# EAGLE board UnoMotorShield (EAGLE 7.2.0)
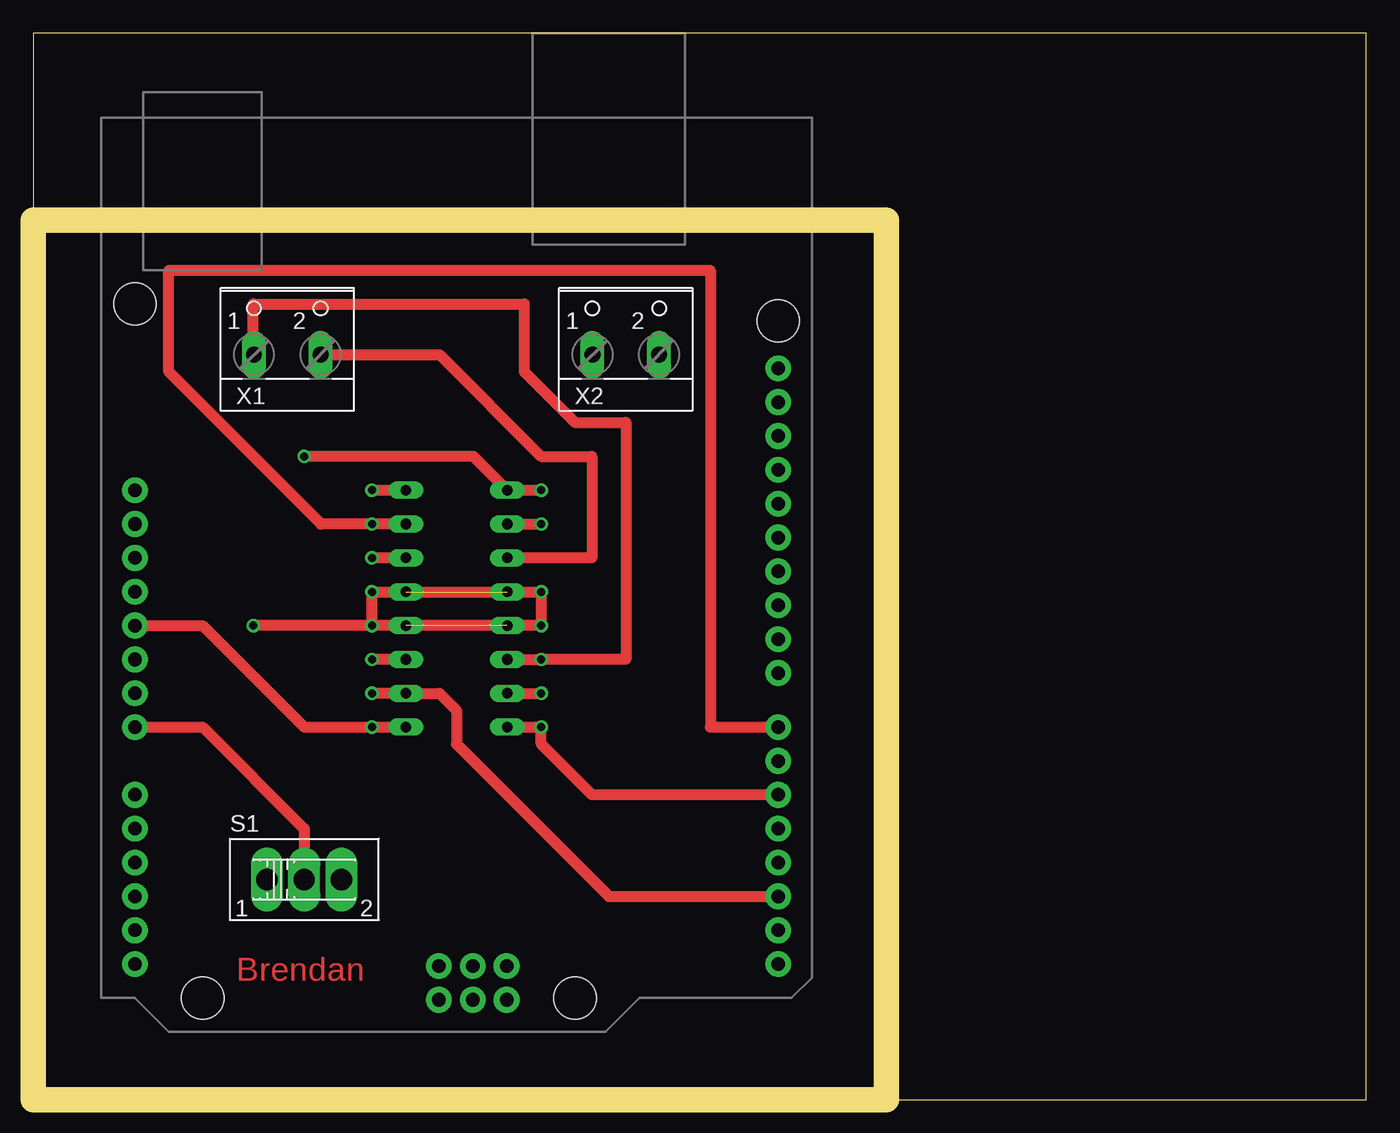
[diagram p0: board, top side]
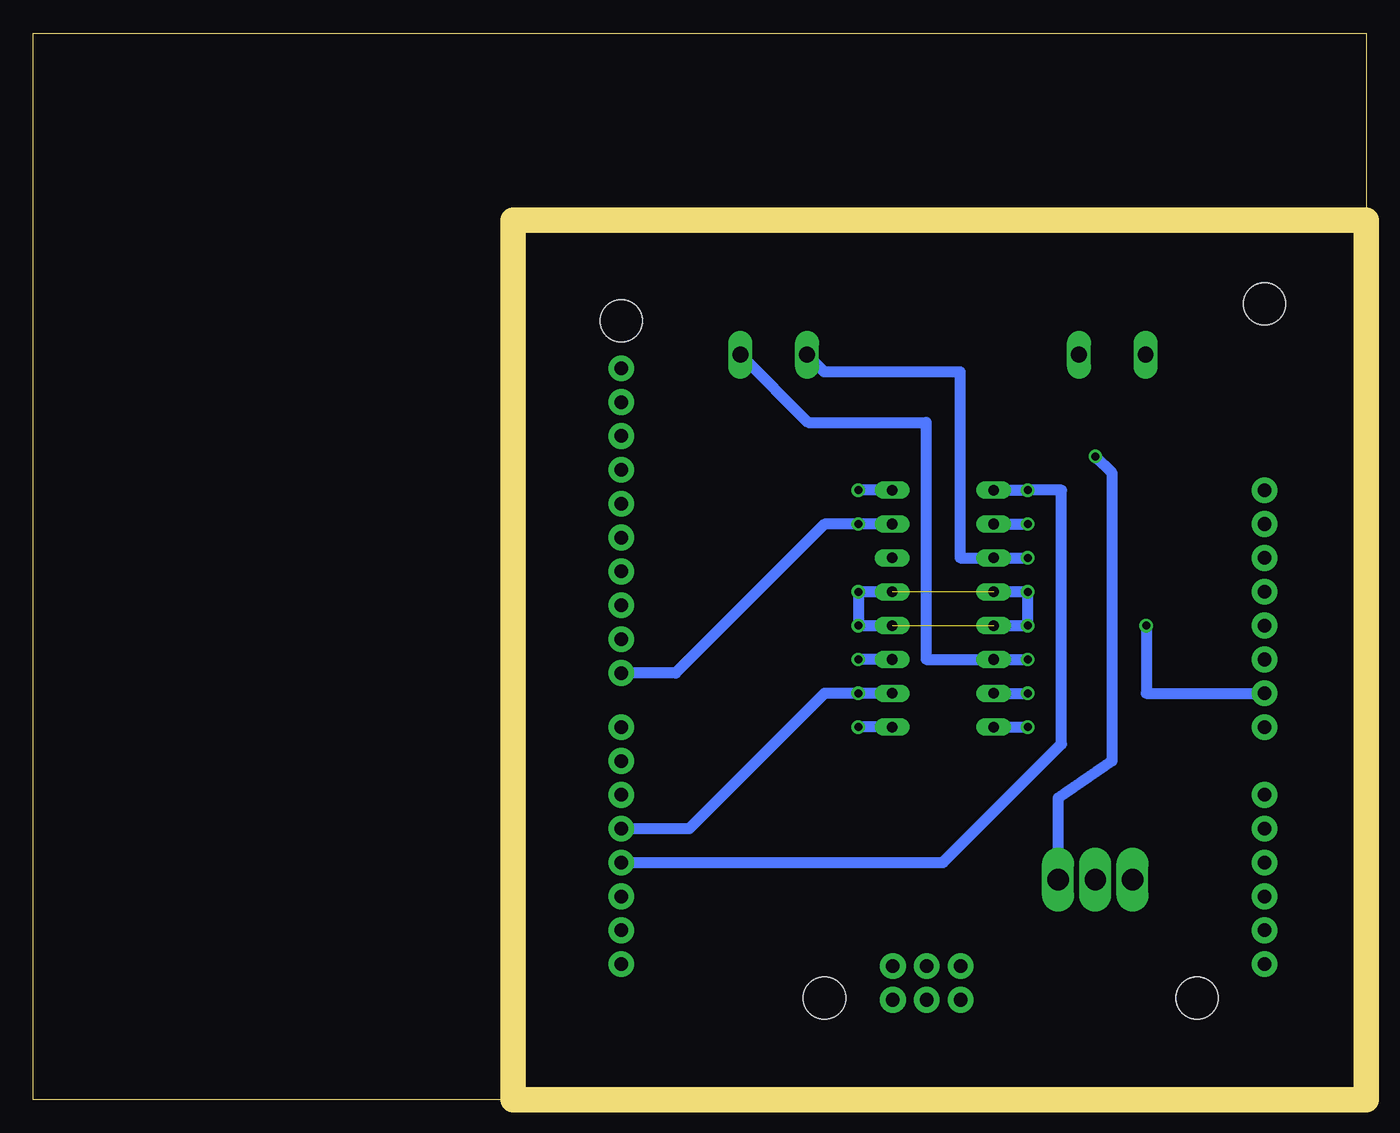
[diagram p1: board, bottom side, seen from below]

Size 100 x 80 mm. Coordinates in mm from the lower left corner, seen from the top.
Outline: 64,0 100,0 100,80 0,80 0,66
Outline: 0,66 0,0 64,0
Outline: 0,66 64,66 64,0
Copper layers (1*16): Top 0.035mm / dielectric 1.5mm / Bottom 0.035mm
Design rules "default": minimum track width 10mil, minimum drill 24mil, track to track 8mil, track to pad 8mil, pad to pad 8mil, via to via 8mil, smd to smd 8mil, copper to edge 40mil, drill to drill 8mil, minimum pad ring 10mil, minimum via ring 8mil, stop-mask expansion 4mil, vias tented up to drill 0mil, thermal gap 10mil

## Footprints (pad centres in the part's own frame; a part is rotated, then mirrored left to right if it is on the bottom)
ARDUINO_R3 = drill 1.016 pad 1.93: 3.3V 35.56,2.54; 5V 38.1,2.54; A0 50.8,2.54; A1 53.34,2.54; A2 55.88,2.54; A3 58.42,2.54; A4 60.96,2.54; A5 63.5,2.54; AREF 23.876,50.8; D0 63.5,50.8; D1 60.96,50.8; D2 58.42,50.8; D3 55.88,50.8; D4 53.34,50.8; D5 50.8,50.8; D6 48.26,50.8; D7 45.72,50.8; D8 41.656,50.8; D9 39.116,50.8; D10 36.576,50.8; D11 34.036,50.8; D12 31.496,50.8; D13 28.956,50.8; GND@1 40.64,2.54; GND@2 43.18,2.54; GND@3 26.416,50.8; GND@4 66.18,25.35; IOREF 30.48,2.54; MISO 63.64,30.43; MOSI 66.18,27.89; NC 27.94,2.54; RESET@1 33.02,2.54; RESET@2 63.64,25.35; SCK 63.64,27.89; SCL 18.796,50.8; SDA 21.336,50.8; VCC 66.18,30.43; VIN 45.72,2.54 | hole 3.175: 15.24,50.8; 66.04,35.56; 66.04,7.62; 13.97,2.54
SLIDE_SWITCH = drill 1.6 long: 1 -2.794,0; 2 0,0; 3 2.794,0
DIP16 = drill 0.8 long: P1 -8.89,-3.81; P2 -6.35,-3.81; P3 -3.81,-3.81; P4 -1.27,-3.81; P5 1.27,-3.81; P6 3.81,-3.81; P7 6.35,-3.81; P8 8.89,-3.81; P9 8.89,3.81; P10 6.35,3.81; P11 3.81,3.81; P12 1.27,3.81; P13 -1.27,3.81; P14 -3.81,3.81; P15 -6.35,3.81; P16 -8.89,3.81
2PIN-SCREW-TERMINAL = drill 1.194 long: 1 -2.5,-1.27; 2 2.5,-1.27

## Placement (x,y rotation side)
J1  ARDUINO_UNO_R3  [ARDUINO_R3]  5.08,73.66 270 top
S1  [SLIDE_SWITCH]  20.32,16.51 0 top
U$1  MOTOR_DRIVERDIP16  [DIP16]  31.75,36.83 90 top
X1  [2PIN-SCREW-TERMINAL]  19.05,57.15 0 top
X2  [2PIN-SCREW-TERMINAL]  44.45,57.15 0 top

## Library data of the parts
J1 S1 U$1 = ISCTrainingProgram
X1 X2 = ISCTrainingProgram; MPN: 237-102; OC_FARNELL: unknown; OC_NEWARK: 70K9898

## Nets
N$1: U$1.P3 X1.1
N$2: U$1.P6 X1.2
N$3: U$1.P11 X2.1
N$4: U$1.P14 X2.2
N$5: J1.5V U$1.P16
N$6: J1.GND@2 U$1.P4 U$1.P5 U$1.P12 U$1.P13
N$7: J1.VIN S1.2
N$8: S1.3 U$1.P8
N$9: J1.D2 U$1.P15
N$10: J1.D3 U$1.P9
N$11: J1.D4 U$1.P2
N$12: J1.D5 U$1.P1
N$13: J1.D7 U$1.P10
N$14: J1.D8 U$1.P7

## Tracks (layer width: path | path; a pad name or v marks a point on that pad's centre or on a via)
N$1  (via drill 0.6)
  Top 0.813: U$1.P3 v38.1,33.02 44.45,33.02 44.45,50.8 40.64,50.8 36.83,54.61 36.83,59.69 16.51,59.69 16.51,55.92 X1.1
  Bottom 0.813: U$1.P3 v38.1,33.02
N$2
  Top 0.813: X1.2 30.48,55.88 38.1,48.26 41.91,48.26 41.91,40.64 U$1.P6
N$3  (via drill 0.6)
  Top 0.813: U$1.P11 v25.4,40.64
  Bottom 0.813: v25.4,40.64 U$1.P11 30.48,40.64 30.48,54.61 40.68,54.61 X2.1
N$4  (via drill 0.6)
  Top 0.813: U$1.P14 v25.4,33.02
  Bottom 0.813: v25.4,33.02 U$1.P14 33.02,33.02 33.02,50.8 41.87,50.8 X2.2
N$5  (via drill 0.6)
  Top 0.813: J1.5V 12.7,35.56 20.32,27.94 v25.4,27.94 U$1.P16
  Bottom 0.813: U$1.P16 v25.4,27.94
N$6  (via drill 0.6)  (2 unrouted)
  Top 0.813: v25.4,35.56 U$1.P13 U$1.P4 v38.1,35.56 v38.1,38.1 U$1.P12 v25.4,38.1 v25.4,35.56 | v25.4,35.56 v16.51,35.56
  Bottom 0.813: U$1.P13 v25.4,35.56 v25.4,38.1 U$1.P12 | U$1.P5 v38.1,38.1 v38.1,35.56 U$1.P4 | v16.51,35.56 16.51,30.48 J1.GND@2
N$7
  Top 0.813: J1.VIN 12.7,27.94 20.32,20.32 S1.2
N$8  (via drill 0.6)
  Top 0.813: v38.1,45.72 U$1.P8 33.02,48.26 v20.32,48.26
  Bottom 0.813: U$1.P8 v38.1,45.72 | S1.3 23.11,22.61 19.05,25.4 19.05,46.99 v20.32,48.26
N$9  (via drill 0.6)
  Top 0.813: J1.D2 43.18,15.24 31.75,26.67 31.75,29.21 30.48,30.48 U$1.P15 v25.4,30.48
  Bottom 0.813: U$1.P15 v25.4,30.48
N$10  (via drill 0.6)
  Top 0.813: v25.4,45.72 U$1.P9
  Bottom 0.813: U$1.P9 v25.4,45.72 22.86,45.72 22.86,26.67 31.75,17.78 J1.D3
N$11  (via drill 0.6)
  Top 0.813: U$1.P2 v38.1,30.48
  Bottom 0.813: v38.1,30.48 U$1.P2 40.64,30.48 50.8,20.32 J1.D4
N$12  (via drill 0.6)
  Top 0.813: U$1.P1 v38.1,27.94 38.1,26.67 41.91,22.86 J1.D5
  Bottom 0.813: U$1.P1 v38.1,27.94
N$13  (via drill 0.6)
  Top 0.813: v25.4,43.18 U$1.P10 21.59,43.18 10.16,54.61 10.16,62.23 50.8,62.23 50.8,27.94 J1.D7
  Bottom 0.813: U$1.P10 v25.4,43.18
N$14  (via drill 0.6)
  Top 0.813: U$1.P7 v38.1,43.18
  Bottom 0.813: v38.1,43.18 U$1.P7 40.64,43.18 51.82,32 J1.D8

## Text on the board
Top: Brendan